# Altium PCB Power_Supply.PcbDoc
Units mm, origin at the board's own origin, x right, y up, seen from the top; angles counter-clockwise.
Board outline 62 x 53 mm, 2 copper layers (Top Layer, Bottom Layer); 58 components, 32 nets, 148 pads, 77 vias.
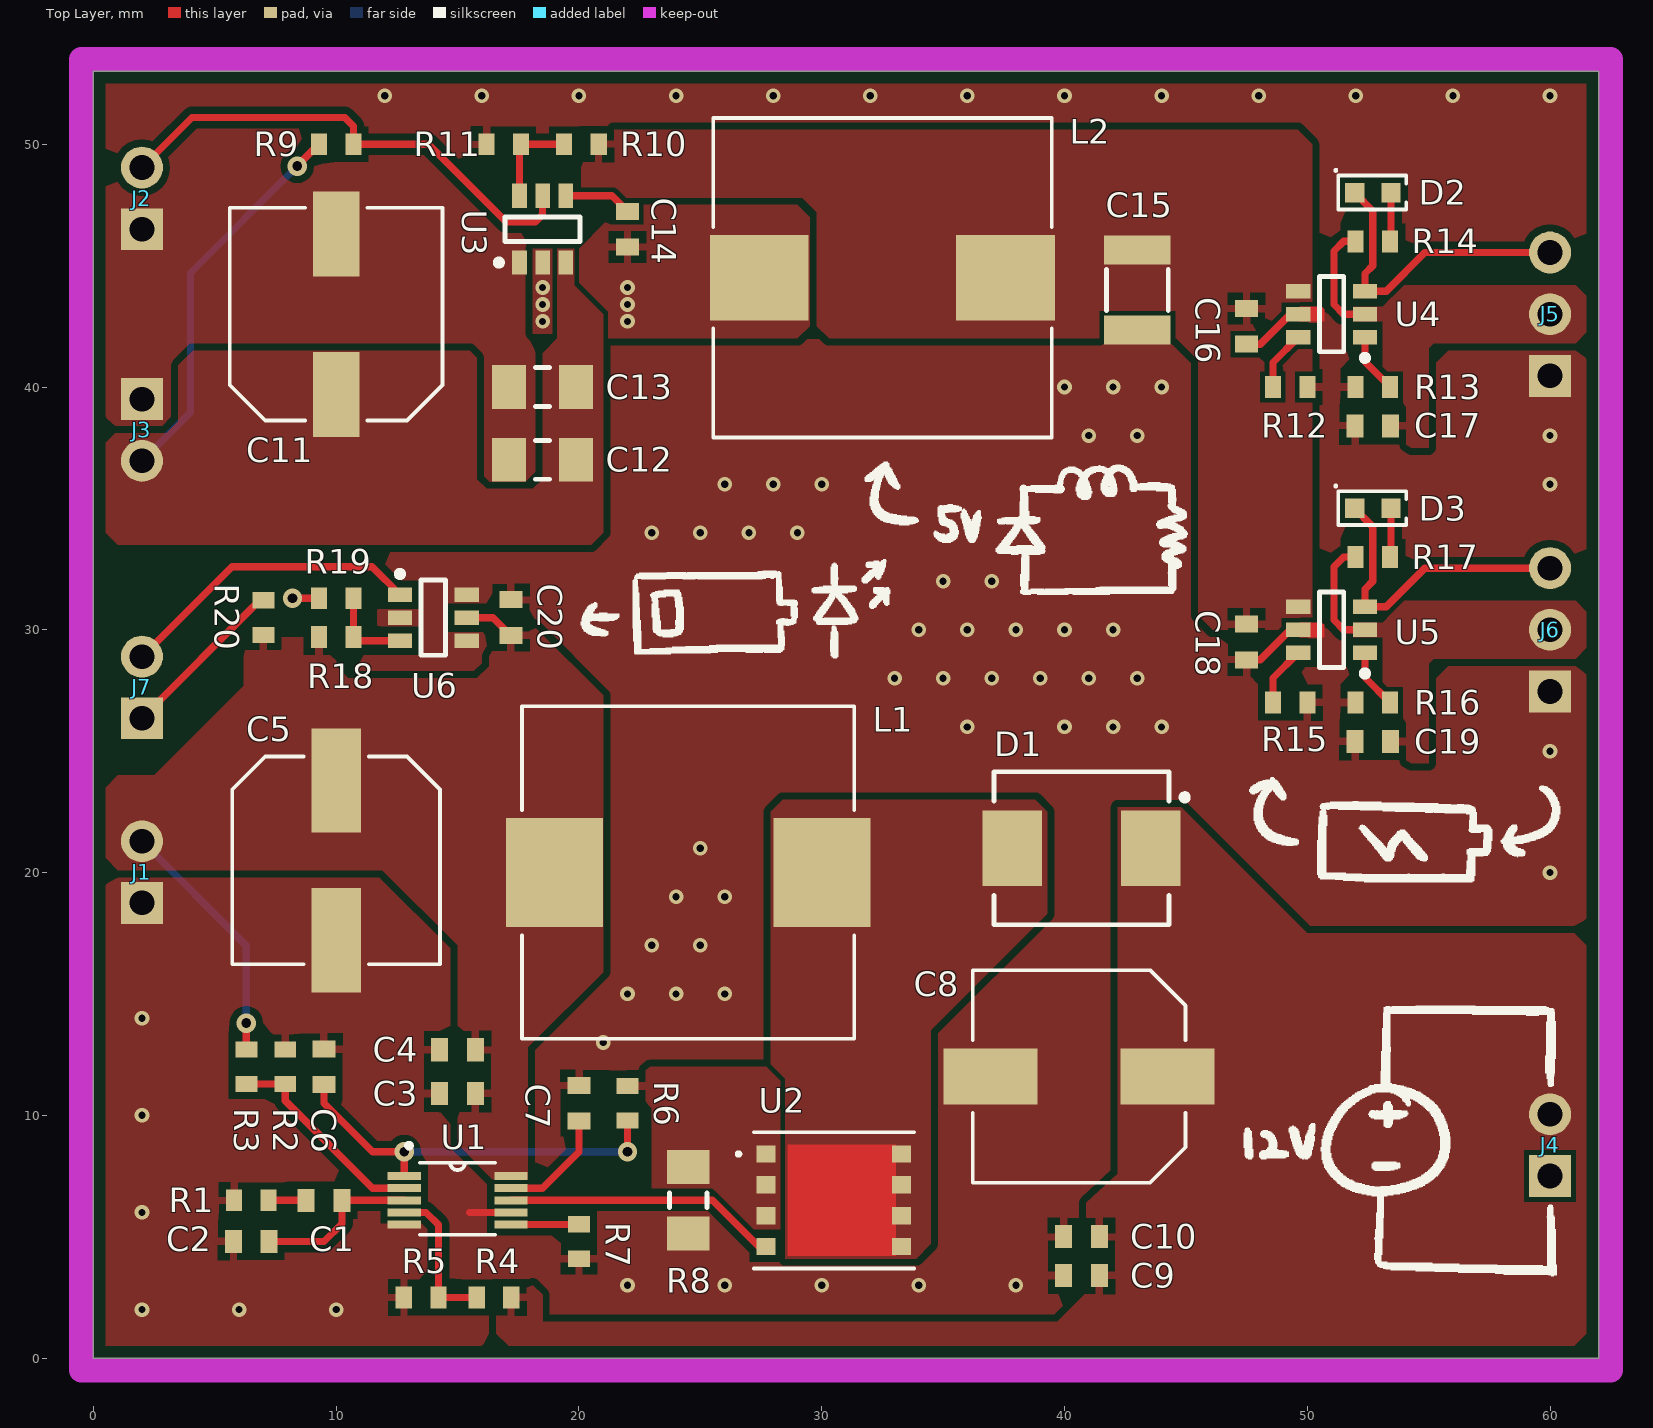
[diagram p0: Top Layer view]
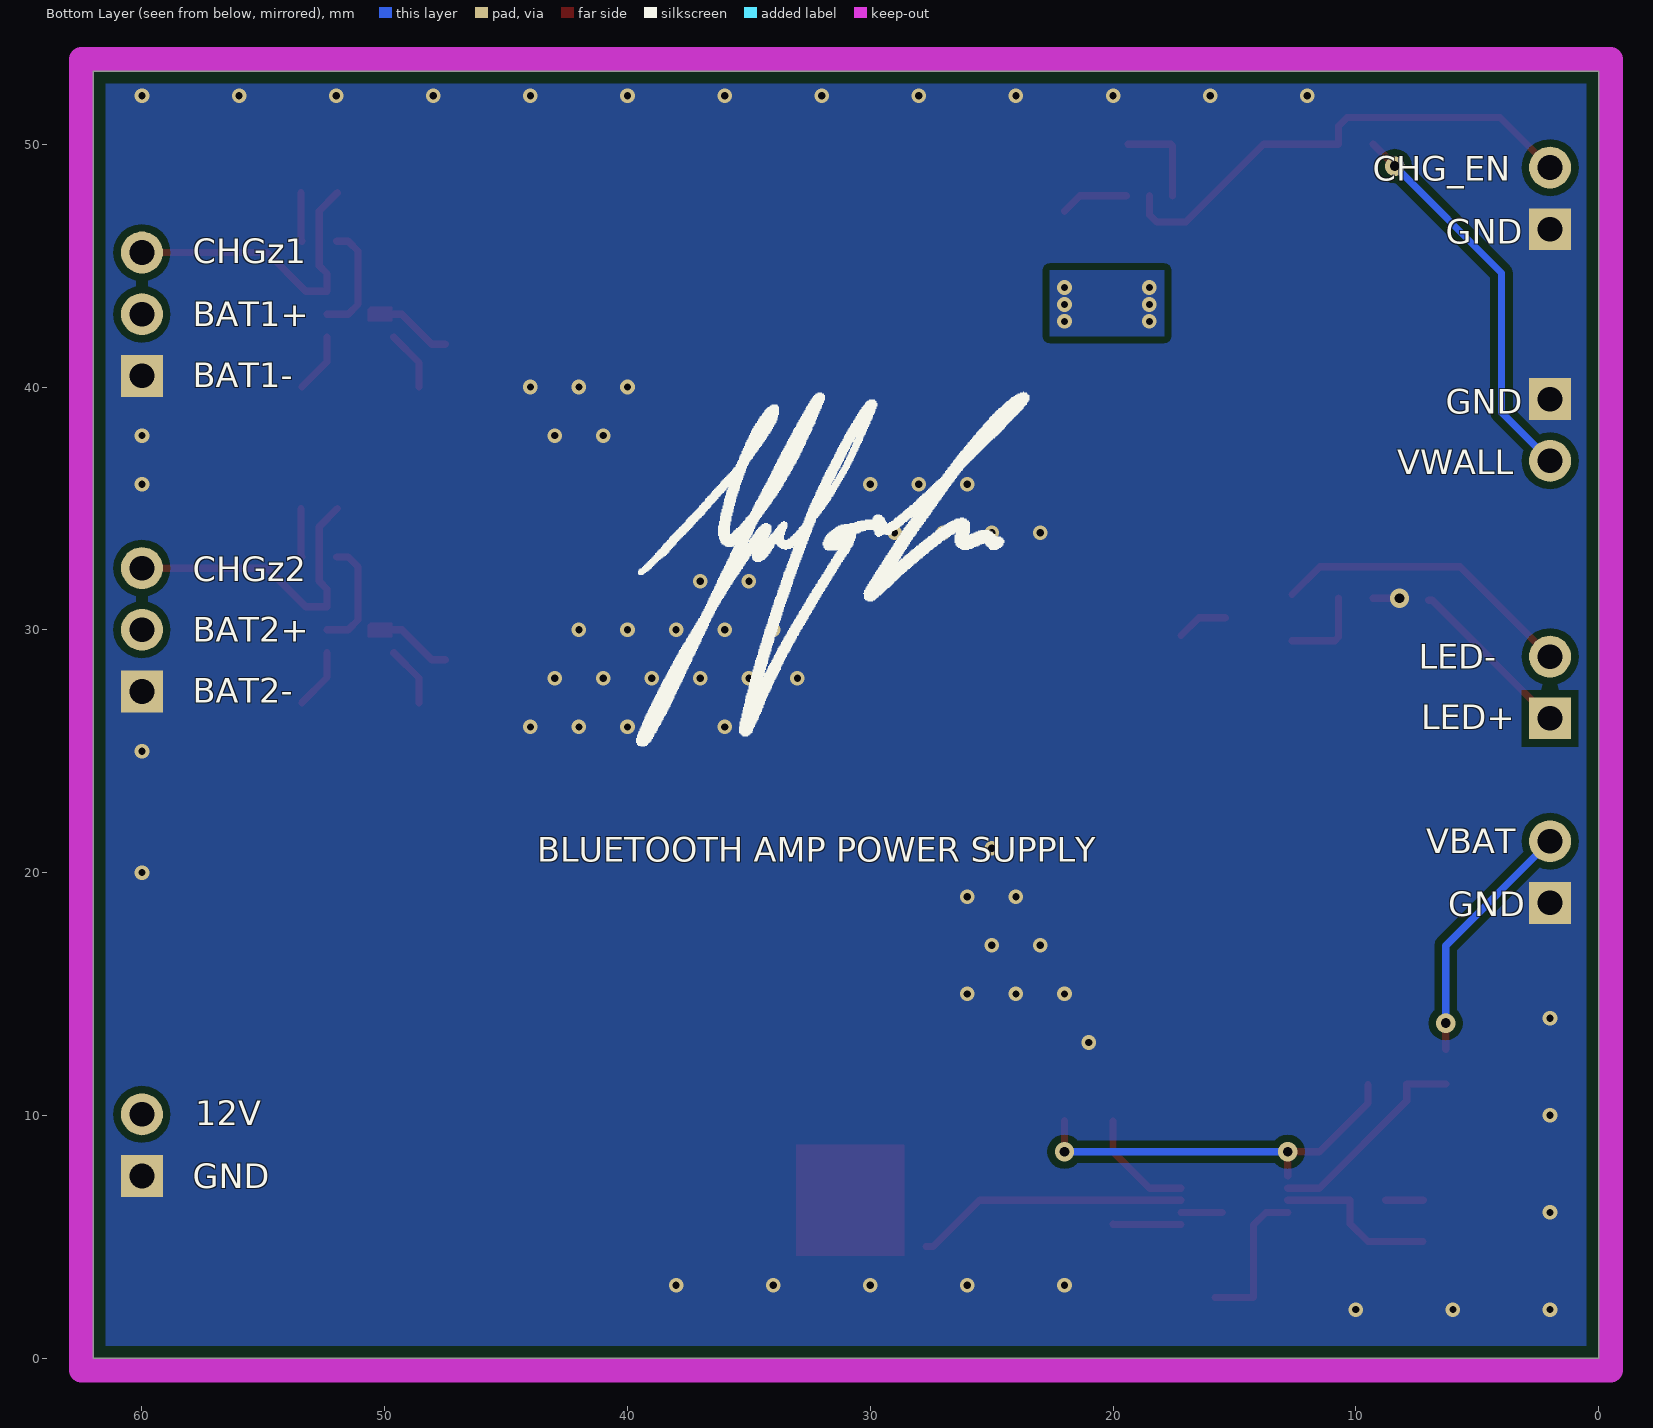
[diagram p1: Bottom Layer view, seen from below]

## Layer stack, top to bottom
Top Solder: solder mask 0.0102, Solder Resist, Dk 3.5
Top Layer: signal copper 0.0356
Dielectric 1: dielectric 0.32, FR-4, Dk 4.8
Bottom Layer: signal copper 0.0356
Bottom Solder: solder mask 0.0102, Solder Resist, Dk 3.5

## Board outline
0,0 62,0 62,53 0,53

## Design rules (kind name [scope] priority, off if disabled: settings)
Clearance Clearance_2 [InNamedPolygon('TOP_GND')   or InNamedPolygon('BOTTOM_GND')] p1: gap=0.2 except(0.127: Track-SMDPad SMDPad-SMDPad; 0.3: Arc-Poly Track-Poly SMDPad-Poly THPad-Poly Via-Poly Fill-Poly Poly-Poly Poly-Region Poly-Text)
Clearance Clearance_1 [InNamedPolygon('NETU1_8_L01_P026')] p2: gap=0.2 except(0.127: Track-SMDPad Track-Poly SMDPad-SMDPad SMDPad-Poly)
Clearance [All] p3: gap=0.2 except(0.127: Track-SMDPad SMDPad-SMDPad)
PolygonConnect PolygonConnect_Relief [HasFootprint('RESC1608X06N') or HasFootprint('CAPC1608X09N')] p1: connectstyle=Relief reliefconductorwidth=0.3 reliefentries=4 polygonreliefangle="90 Angle" airgapwidth=0.3
PolygonConnect [All] p2: connectstyle=Direct reliefconductorwidth=0.254 reliefentries=4 polygonreliefangle="90 Angle" airgapwidth=0.254
RoutingVias [All] p1: holewidth=0.4 width=0.8 viastyle="Through Hole" minholewidth=0.3 minwidth=0.6 maxholewidth=0.711 maxwidth=1.27
SolderMaskExpansion [All] p1: expansion=0.102
Width [All] p1: maxlimit=1 minlimit=0.127 preferedwidth=0.3
30 further rules are at their usual default settings.

## Classes and differential pairs
component class Chargers: C16 C17 C18 C19 D2 D3 J5 J6 R12 R13 R14 R15 R16 R17 U4 U5
component class Converters: C1 C2 C3 C4 C5 C6 C7 C8 C9 C10 C11 C12 C13 C14 C15 D1 J1 J2 J3 J4 L1 L2 R1 R2 R3 R4 R5 R6 R7 R8 R9 R10 R11 U1 U2 U3
component class "Voltage Monitor": C20 J7 R18 R19 R20 U6

## Components (designator, comment, footprint, x,y, rotation, side; value= is the part's Value field where it differs from the comment)
C1 "82nF" CAPC1608X09N 9.5,6.5 r0 top
C2 "3.9nF" CAPC1608X09N 6.5,4.8 r0 top
C3 "0.1uF" CAPC1608X09N 15,10.9 r0 top
C4 "1uF" CAPC1608X09N 15,12.7 r0 top
C5 "220uF" UUD1V221MNL1GS 10,20.5 r270 top
C6 "10nF" CAPC1608X09N 9.5,12 r270 top
C7 "0.47uF" CAPC1608X09N 20,10.5 r90 top
C8 "180uF" PCAP_SVP_E12-M 40.6,11.6 r180 top
C9 "1uF" CAPC1608X09N 40.7,3.4 r0 top
C10 "1uF" CAPC1608X09N 40.7,5 r0 top
C11 "100uF" PCAP_8X10-ELEC00 10,43 r90 top
C12 "10uF" CAPC3216X18N 18.5,37 r0 top
C13 "10uF" CAPC3216X18N 18.5,40 r0 top
C14 "0.1uF" CAPC1608X09N 22,46.5 r270 top
C15 "47uF" CAPC3225X25M 43,44 r90 top
C16 "1uF" CAPC1608X09N 47.5,42.5 r90 top
C17 "1uF" CAPC1608X09N 52.7,38.4 r0 top
C18 "1uF" CAPC1608X09N 47.5,29.5 r90 top
C19 "1uF" CAPC1608X09N 52.7,25.4 r0 top
C20 "0.1uF" CAPC1608X09N 17.2,30.5 r270 top
D1 "B540C-13-F" DIOM6959X25N 40.7,21 r0 top
D2 "LED 0603" DIOM1608X08N 52.7,48 r0 top
D3 "LED 0603" DIOM1608X08N 52.7,35 r0 top
J1 "2POS THRU HOLE 2.54MM" "2POS Through Hole 2.54MM" 2,18.75 r90 top
J2 "2POS THRU HOLE 2.54MM" "2POS Through Hole 2.54MM" 2,46.5 r90 top
J3 "2POS THRU HOLE 2.54MM" "2POS Through Hole 2.54MM" 2,39.5 r270 top
J4 "2POS THRU HOLE 2.54MM" "2POS Through Hole 2.54MM" 60,7.5 r90 top
J5 "3POS THRU HOLE 2.54MM" "3POS Through Hole 2.54MM" 60,43 r90 top
J6 "3POS THRU HOLE 2.54MM" "3POS Through Hole 2.54MM" 60,30 r90 top
J7 "2POS THRU HOLE 2.54MM" "2POS Through Hole 2.54MM" 2,26.355 r90 top
L1 "8.2uH" SRP1270 24.5,20 r0 top
L2 "3.3uH" IND_BOURNS_SRP00 32.5,44.5 r0 top
R1 "2.1K" RESC1608X06N 6.5,6.5 r0 top
R2 "15K" RESC1608X06N 7.9,12 r270 top
R3 "41.2k" RESC1608X06N 6.3,12 r90 top
R4 "8.45K" RESC1608X06N 16.5,2.5 r180 top
R5 "1k" RESC1608X06N 13.5,2.5 r0 top
R6 "100R" RESC1608X06N 22,10.5 r90 top
R7 "57.6K" RESC1608X06N 20,4.8 r90 top
R8 "0.009R" RESC3216X07N 24.5,6.5 r90 top
R9 "10k" RESC1608X06N 10,50 r0 top
R10 "56.2K" RESC1608X06N 20.1,50 r0 top
R11 "10k" RESC1608X06N 16.9,50 r0 top
R12 "1k" RESC1608X06N 49.3,40 r180 top
R13 "10k" RESC1608X06N 52.7,40 r180 top
R14 "1.3K" RESC1608X06N 52.7,46 r180 top
R15 "1k" RESC1608X06N 49.3,27 r180 top
R16 "10k" RESC1608X06N 52.7,27 r180 top
R17 "1.3K" RESC1608X06N 52.7,33 r180 top
R18 "16K" RESC1608X06N 10,29.7 r180 top
R19 "1k" RESC1608X06N 10,31.3 r0 top
R20 "1k" RESC1608X06N 7,30.5 r270 top
U1 "LM3481" VSSOP10 15,6.5 r0 top
U2 "CSD16321Q5_DQH_8" DQH8 30.5,6.5 r0 top
U3 "TPS564208DDCR" "SOT95P280X110-6N (DDC)" 18.5,46.5 r90 top
U4 "BQ21040DBVT" "SOT95P280X145-6N (DBV)" 51,43 r180 top
U5 "BQ21040DBVT" "SOT95P280X145-6N (DBV)" 51,30 r180 top
U6 "TPS3710DDCR" "SOT95P280X110-6N (DDC)" 14,30.5 r0 top

## Footprints (in the part's own frame and the unit in brackets; to place one, negate y for a bottom-side part, rotate by r counter-clockwise, add the part's x,y. Pads: shape width x height; smd on the part's side, far side on the other; paste and mask are expansions set on the pad)
"2POS Through Hole 2.54MM" [mil] "Through-hole, 2.54mm Pitch"
  rect 67.99x67.99 hole 40: 1(0,0)
  round 67.99 hole 40: 2(100,0)
"3POS Through Hole 2.54MM" [mil] "Through-hole, 2.54mm Pitch"
  rect 67.99x67.99 hole 40: 1(-100,0)
  round 67.99 hole 40: 2(0,0) 3(100,0)
CAPC1608X09N [mm] "Chip Capacitor, 2-Leads, Body 1.60x0.80mm, IPC Medium Density"
  rect 0.7x0.95 smd: 1(-0.737,0) 2(0.738,0)
  body extent -0.85,-0.45 0.85,0.45, height 0.8
CAPC3216X18N [mm] "Chip Capacitor, 2-Leads, Body 3.20x1.60mm, IPC Medium Density"
  rect 1.4x1.8 smd: 1(-1.375,0) 2(1.375,0)
  silkscreen extent -0.3,-0.8 0.3,0.8, body extent -1.68,-0.87 1.67,0.87, height 1.8
CAPC3225X25M [mm] "Chip Capacitor, 2-Leads, Body 3.20x2.50mm, IPC Low Density"
  rect 1.2x2.75 smd: 1(-1.65,0) 2(1.65,0)
  silkscreen extent -0.85,-1.27 0.85,1.28, body extent -1.6,-1.25 1.6,1.25, height 2.5
DIOM1608X08N [mm] "Molded Diode, 2-Leads, Body 1.60x0.80mm, IPC Medium Density"
  rect 0.8x0.8 smd: 1(-0.75,0) 2(0.75,0)
  silkscreen extent -1.57,-0.69 1.38,0.97, body extent -0.8,-0.4 0.8,0.4, height 0.8
DIOM6959X25N [mm] "Molded Diode, 2-Leads, Body 6.85x5.90mm, IPC Medium Density"
  rect 2.45x3.1 smd: 1(-2.85,0) 2(2.85,0)
  silkscreen extent -3.6,-3.15 4.38,3.15, body extent -3.77,-3.11 3.77,3.11, height 2.5
DQH8 [mil]
  rect 31x28 smd paste-14: 1(-110,75) 2(-110,25) 3(-110,-25) 4(-110,-75) 5(110,-75) 6(110,-25) 7(110,25) 8(110,75)
  Top Layer region: -75,90 -75,75 -75,-75 -75,-90 100,-90 100,90
  silkscreen extent -157,-110 130,110, body extent -118,-98 118,98, height 39
IND_BOURNS_SRP00 [mil]
  rect 160x138 smd: 1(-199.5,0) 2(199.5,0)
  silkscreen extent -274,-259 274,259, body extent -269,-254 270,254, height 276
PCAP_8X10-ELEC00 [mil]
  rect 138x75 smd: 1(-130,0) 2(130,0)
  silkscreen extent -172,-172 172,172, body extent -183,-167 183,168, height 407
PCAP_SVP_E12-M [mil]
  rect 153x91 smd: 1(-143.5,0) 2(143.5,0)
  silkscreen extent -172,-172 173,173, body extent -181,-167 181,168, height 474
RESC1608X06N [mm] "Chip Resistor, 2-Leads, Body 1.60x0.80mm, IPC Medium Density"
  rect 0.67x0.9 smd: 1(-0.713,0) 2(0.713,0)
  body extent -0.85,-0.45 0.85,0.45, height 0.55
RESC3216X07N [mm] "Chip Resistor, 2-Leads, Body 3.20x1.60mm, IPC Medium Density"
  rect 1.4x1.75 smd: 1(-1.375,0) 2(1.375,0)
  silkscreen extent -0.3,-0.77 0.3,0.77, body extent -1.73,-0.87 1.72,0.87, height 0.7
"SOT95P280X110-6N (DDC)" [mm] "SOT23, 6-Leads, Body 2.90x2.80mm, Pitch 0.95mm, IPC Medium Density"
  rect 1x0.6 smd mask+0.05: 1(-1.375,0.95) 2(-1.375,0) 3(-1.375,-0.95) 4(1.375,-0.95) 5(1.375,0) 6(1.375,0.95)
  silkscreen extent -1.5,-1.55 0.5,1.92, body extent -1.53,-1.53 1.53,1.53, height 1.1
"SOT95P280X145-6N (DBV)" [mm] "SOT23, 6-Leads, Body 2.90x2.80mm, Pitch 0.95mm, IPC Medium Density"
  rect 1x0.6 smd: 1(-1.375,0.95) 2(-1.375,0) 3(-1.375,-0.95) 4(1.375,-0.95) 5(1.375,0) 6(1.375,0.95)
  silkscreen extent -1.5,-1.55 0.5,1.92, body extent -1.5,-1.53 1.5,1.53, height 1.45
SRP1270 [mil]
  rect 157.5x177 smd: 1(-216.75,0) 2(216.75,0)
  silkscreen extent -270,-270 270,270, body extent -270,-268 270,272, height 276
UUD1V221MNL1GS [mil]
  rect 169x80 smd: 1(-129.5,0) 2(129.5,0)
  silkscreen extent -169,-169 169,169, body extent -175,-163 175,164, height 396
VSSOP10 [mil] "DGS (S-PDS0-G10"
  rect 54x13 smd mask+1: 1(-86.5,39.37) 2(-86.5,19.68) 3(-86.5,0) 4(-86.5,-19.68) 5(-86.5,-39.37) 6(86.5,-39.37) 7(86.5,-19.68) 8(86.5,0) 9(86.5,19.68) 10(86.5,39.37)
  silkscreen extent -83,-56 61,93, body extent -97,-59 97,59, height 42

## Part data
C1: library part "CAP CER 82nF 0603"
C2: library part "CAP CER 3.9nF 0603"
C3 C14 C20: library part "CAP CER 0.1uF 0603"
C4 C9 C10 C16 C17 C18 C19: library part "CAP CER 1uF 0603"
C5: library part "CAP ALUM 220uF SMD"
C6: library part "CAP CER 10nF 0603", "Bypass caps"
C7: library part "CAP CER 0.47uF 0603"
C8: library part "CAP ALUM 180uF SMD"
C11: library part "CAP ALUM 100uF SMD"
C12 C13: library part "CAP CER 10uF 1206", "3V3 filter cap"
C15: library part "CAP CER 47uF X5R 1210"
D1: "Diode Schottky 40V 5A SMT"
L1: library part "IND 8.2uH 11A SMD NONSTANDARD"
L2: library part "IND 3.3µH 7A SMD"
R1: library part "RES 2.1K 0603"
R2: library part "RES 15K 0603"
R3: library part "RES 41.2K 0603"
R4: library part "RES 8.45K 0603"
R5 R12 R15 R19 R20: library part "RES 1K 0603"
R6: library part "RES 100R 0603"
R7: library part "RES 57.6K 0603"
R8: library part "RES 0.009R 1206"
R9 R11 R13 R16: library part "RES 10K 0603"
R10: library part "RES 56.2K 0603"
R14 R17: library part "RES 1.3K 0603"
R18: library part "RES 16K 0603"
U1: "IC REG CTRLR MULT TOP 10MSOP"
U3: "Regulator, Buck, 4.5V-17V Input, SOT-23"
U4 U5: "Charger, Li-Ion, SOT-23-6"
U6: "Voltage Monitor, 400mV, Open Drain"

## Via types
v1: diameter 0.6, hole 0.3, Top Layer to Bottom Layer, tented both sides, 72 vias
v2: diameter 0.8, hole 0.4, Top Layer to Bottom Layer, tented both sides, 5 vias

## Nets (pads, with @x,y where several pads share a name; then routed paths per layer and width w, separated by ;. In a path a pad name is that pad's centre, name@x,y a point inside that pad or via, vN(x,y) a via of type N, cw(c..) or ccw(c..) an arc to the next point about the centre after c; other vN are vias at no path point)
5V: C15.2 C16.2 C18.2 L2.2 R10.2 U4.4 U5.4
12V: C8.1 C9.2 C10.2 D1.2 J4.2 R4.1
BAT_1: C17.2 J5.2 R14.2 U4.2 | length 4.7
  Top Layer w0.3: R14.2 51.5,46 51.1,45.6 51.1,43.4 51.5,43 U4.2
BAT_2: C19.2 J6.2 R17.2 U5.2 | length 4.7
  Top Layer w0.3: R17.2 51.5,33 51.1,32.6 51.1,30.4 51.5,30 U5.2
CHG_EN: J2.2 R9.2 U3.5 | length 20.5
  Top Layer w0.3: J2.2 4.06,51.1 10.35,51.1 10.713,50.738 R9.2 13.8,50 17,46.8 18.2,46.8 18.5,47.1 U3.5
GND: C2.1 C3.1 C4.1 C5.2 C6.1 C7.2 C8.2 C9.1 C10.1 C11.2 C12.1 C13.1 C15.1 C16.1 C17.1 C18.1 C19.1 C20.1 J1.1 J2.1 J3.1 J4.1 J5.1 J6.1 R1.1 R2.1 R5.1 R7.1 R8.1 R11.1 R12.1 R13.2 R15.1 R16.2 R19.1 U1.5 U1.7 U3.1 U4.5 U5.5 U6.2 U6.4 U6.6 | length 8.2
  Top Layer w0.3: v2@8.1,31.3 v2(8.2,31.3) R19.1 ; 15.5,6 U1.7 ; C18.1 48.063,28.762 49.3,30 U5.5 ; C16.1 48.063,41.762 49.3,43 U4.5
  other v1: 2,2 6,2 10,2 22,3 26,3 30,3 34,3 38,3 2,6 2,10 21,13 2,14 22,15 24,15 26,15 23,17 25,17 24,19 26,19 60,20 25,21 60,25 36,26 40,26 42,26 44,26 33,28 35,28 37,28 39,28 41,28 43,28 34,30 36,30 38,30 40,30 42,30 35,32 37,32 23,34 25,34 27,34 29,34 26,36 28,36 30,36 60,36 41,38 43,38 60,38 40,40 42,40 44,40 12,52 16,52 20,52 24,52 28,52 32,52 36,52 40,52 44,52 48,52 52,52 56,52 60,52
LED+: J7.1 R20.1 | length 7
  Top Layer w0.3: J7.1 6.858,31.213 R20.1
LED-: J7.2 U6.1 | length 12.6
  Top Layer w0.3: J7.2 5.705,32.6 11.475,32.6 U6.1
NetC1_1: C1.1 R1.2 | length 1.5
  Top Layer w0.3: R1.2 C1.1
NetC1_2: C1.2 C2.2 U1.3 | length 6.8
  Top Layer w0.3: C2.2 9.5,4.8 10.238,5.538 C1.2 U1.3
NetC6_2: C6.2 R6.1 U1.1 | length 16.4
  Top Layer w0.3: C6.2 9.5,10.5 11.5,8.5 v2(12.8,8.5) U1.1@12.8,7.503 ; v2(22,8.5) R6.1
  Bottom Layer w0.3: v2(12.8,8.5) v2(22,8.5)
NetC7_1: C7.1 U1.9 | length 4.7
  Top Layer w0.3: U1.9 18.5,7 20,8.5 C7.1
NetC14_1: C14.1 U3.4 | length 2.8
  Top Layer w0.3: U3.4 21.362,47.875 C14.1
NetC14_2: C14.2 L2.1 U3.2
  other v1: 18.5,42.7 22,42.7 18.5,43.4 22,43.4 18.5,44.1 22,44.1
NetD1_1: D1.1 L1.2 U2.5 U2.6 U2.7 U2.8
NetD2_1: D2.1 J5.3 U4.3 | length 12.3
  Top Layer w0.3: D2.1 52.7,47.25 52.7,45 52.375,44.675 U4.3 53.25,43.95 54.84,45.54 J5.3@59.5,45.54
NetD2_2: D2.2 R14.1 | length 2
  Top Layer w0.3: R14.1 53.45,46.037 D2.2
NetD3_1: D3.1 J6.3 U5.3 | length 12.3
  Top Layer w0.3: D3.1 52.7,34.25 52.7,32 52.375,31.675 U5.3 53.25,30.95 54.84,32.54 J6.3@59.5,32.54
NetD3_2: D3.2 R17.1 | length 2
  Top Layer w0.3: R17.1 53.45,33.037 D3.2
NetR2_2: R2.2 R3.1 U1.2 | length 8.7
  Top Layer w0.3: R3.1 R2.2 7.9,10.6 11.5,7 U1.2
NetR4_2: R4.2 R5.2 U1.4 | length 6.2
  Top Layer w0.3: U1.4 13.7,6 14.213,5.487 R5.2 R4.2
NetR6_2: R6.2 R8.2 U2.1 U2.2 U2.3
NetR7_2: R7.2 U1.6 | length 2.8
  Top Layer w0.3: U1.6 19.987,5.5 R7.2
NetR10_1: R10.1 R11.2 U3.6 | length 3.9
  Top Layer w0.3: U3.6 17.55,49.937 R11.2 R10.1
NetR12_2: R12.2 U4.6 | length 2.5
  Top Layer w0.3: R12.2 48.588,41.012 U4.6
NetR13_1: R13.1 U4.1 | length 2.5
  Top Layer w0.3: U4.1 52.375,41.037 R13.1
NetR15_2: R15.2 U5.6 | length 2.5
  Top Layer w0.3: R15.2 48.588,28.012 U5.6
NetR16_1: R16.1 U5.1 | length 2.5
  Top Layer w0.3: U5.1 52.375,28.037 R16.1
NetR18_1: R18.1 R19.2 U6.3 | length 3.6
  Top Layer w0.3: R19.2 R18.1 10.862,29.55 U6.3
NetU1_8: U1.8 U2.4 | length 11.3
  Top Layer w0.3: U1.8 25.5,6.5 27.405,4.595 U2.4
VBAT: C3.2 C4.2 C5.1 C20.2 J1.2 L1.1 R3.2 R18.2 R20.2 U1.10 U6.5 | length 12.5
  Top Layer w0.3: R3.2 v2(6.3,13.8) ; U6.5 16.462,30.5 C20.2
  Bottom Layer w0.3: J1.2 6.3,16.99 v2(6.3,13.8)
VWALL: C11.1 C12.2 C13.2 J3.2 R9.1 U3.3 | length 16.1
  Top Layer w0.3: v2(8.4,49.1) 8.4,49.113 R9.1
  Bottom Layer w0.3: J3.2 4,38.96 4,44.7 v2(8.4,49.1)

## Polygon pours and split planes (outlines as drawn)
VWALL on Top Layer "VWALL_L01_P012" (solid, remove dead copper, pour order 12): 0.5,37.7 0.5,34 1,33.5 20.5,33.5 21,34 21,43 19.8,44.2 19.8,45.7 19.1,45.7 19.1,42 18.5,41.4 18.5,36.2 18.1,35.8 16.2,35.8 15.8,36.2 15.8,41.2 15.5,41.5 11,41.5 4.1,41.5 3.5,40.9 3.5,38.6 3,38.1 0.9,38.1
GND on Top Layer "TOP_GND" (solid, remove dead copper, pour order 42): 0.5,52.5 61.5,52.5 61.5,0.5 0.5,0.5
5V on Top Layer "5V_L01_P020" (solid, remove dead copper, pour order 20): 20.1,47.8 20.1,50.6 49.6,50.6 50.2,50 50.2,30 46.1,30 45.5,30.6 45.5,32 45.5,41.1 44.6,42 30.3,42 29.8,42.5 29.8,47.2 29.2,47.8
NetD1_1 on Top Layer "GND_BOTTOM" (solid, remove dead copper, pour order 32): 28.5,4.1 28.5,11.5 27.9,12.1 27.9,22.5 28.4,23 38.8,23 39.3,22.5 39.3,18.3 34.5,13.5 34.5,4.7 33.9,4.1
BAT_2 on Top Layer "BAT_2_L01_P040" (solid, remove dead copper, pour order 40): 51.9,30.3 53.1,30.3 54,31.2 61.05,31.2 61.5,30.75 61.5,29.25 61.05,28.8 55.2,28.8 55,28.6 55,24.5 53.1,24.5 53.1,29.7 51.9,29.7
BAT_1 on Top Layer "BAT_1_L01_P036" (solid, remove dead copper, pour order 36): 51.9,43.3 53.1,43.3 54,44.2 61.05,44.2 61.5,43.75 61.5,42.25 61.05,41.8 55.2,41.8 55,41.6 55,37.5 53.1,37.5 53.1,42.7 51.9,42.7
NetR6_2 on Top Layer "GND_BOTTOM" (solid, remove dead copper, pour order 34): 21.4,12 21.4,10.8 22.5,10.8 23,10.3 23,7 25.5,7 27.2,5.3 28.3,5.3 28.3,12
12V on Top Layer "12V_L01_P008" (solid, remove dead copper, pour order 8): 40.9,2.7 39.7,1.5 18.5,1.5 18.5,2.6 18,3.1 16.6,3.1 16.6,1 17.1,0.5 39.6,0.5 50,0.5 61,0.5 61.5,1 61.5,17 61,17.5 50,17.5 44.8,22.7 42.2,22.7 42.2,7.6 40.9,6.4
VBAT on Top Layer "VBAT_L01_P000" (solid, remove dead copper, pour order 0): 0.5,20.6 0.5,23.5 1,24 2.5,24 6.2,27.7 6.2,29.7 10,29.7 10,28.5 10.5,28 15.8,28 16.3,28.5 16.3,30.3 18,30.3 21,27.3 21,15.9 17.9,12.8 17.9,7.3 16.5,7.3 15,8.8 15,15.4 15,17 11.9,20.1 1,20.1
NetC14_2 on Top Layer "NETC14_2_L01_P014" (solid, pour order 14): 18.1,45.7 18.9,45.7 18.9,42.2 18.1,42.2
NetC14_2 on Top Layer "NETC14_2_L01_P018" (solid, remove dead copper, pour order 18): 20,45.7 21.8,47.5 29,47.5 29.5,47 29.5,42.5 29,42 21.2,42 21.2,43.1 20,44.3
GND on Bottom Layer "BOTTOM_GND" (solid, remove dead copper, pour order 44): 0.5,52.5 61.5,52.5 61.5,0.5 0.5,0.5
NetC14_2 on Bottom Layer "NETC14_2_L02_P016" (solid, pour order 16): 17.9,44.8 22.6,44.8 22.6,42.1 17.9,42.1

## Keep-outs
Keep-Out Layer:
  lines w1: -0.5,-0.5 62.5,-0.5 62.5,53.5 -0.5,53.5 -0.5,-0.5

## Other copper
Top Layer:
  region net GND: 49.7,43.3 50.601,43.3 50.7,43.201 50.7,42.7 49.7,42.7
  region net GND: 49.7,30.3 50.601,30.3 50.7,30.201 50.7,29.7 49.7,29.7

## Silkscreen, mask and mechanical layers (free items; w line width, h text height)
Top Overlay:
  drawing of 2645 lines, arcs and shapes, not listed
Bottom Overlay:
  drawing of 1694 lines, arcs and shapes, not listed
  text "CHG_EN" at 9.3,48.5 h1
  text "GND" at 6.3,45.9 h1
  text "CHGz1" at 57.9,45.1 h1
  text "BAT1+" at 57.9,42.5 h1
  text "BAT1-" at 57.9,40 h1
  text "GND" at 6.3,38.9 h1
  text "VWALL" at 8.3,36.4 h1
  text "CHGz2" at 57.9,32 h1
  text "BAT2+" at 57.9,29.5 h1
  text "LED-" at 7.4,28.4 h1
  text "BAT2-" at 57.9,27 h1
  text "LED+" at 7.3,25.9 h1
  text "VBAT" at 7.1,20.8 h1
  text "BLUETOOTH AMP POWER SUPPLY" at 43.718,20.452 h1
  text "GND" at 6.2,18.2 h1
  text "12V" at 57.8,9.6 h1
  text "GND" at 57.9,7 h1
Mechanical 15:
  lines w0.2: 3.5,17.3 3.5,53.9